# Altium PCB bdcmc.PcbDoc (part 2 of 2)
Units mm, origin at the board's own origin, x right, y up, seen from the top; angles counter-clockwise.
Board outline 100.53 x 64.8 mm, 4 copper layers (Top Layer, Layer 1, Layer 2, Bottom Layer), stack 1.601 mm thick; 206 components, 95 nets, 604 pads, 256 vias.
Unrouted connection lines stored in the file: 2.
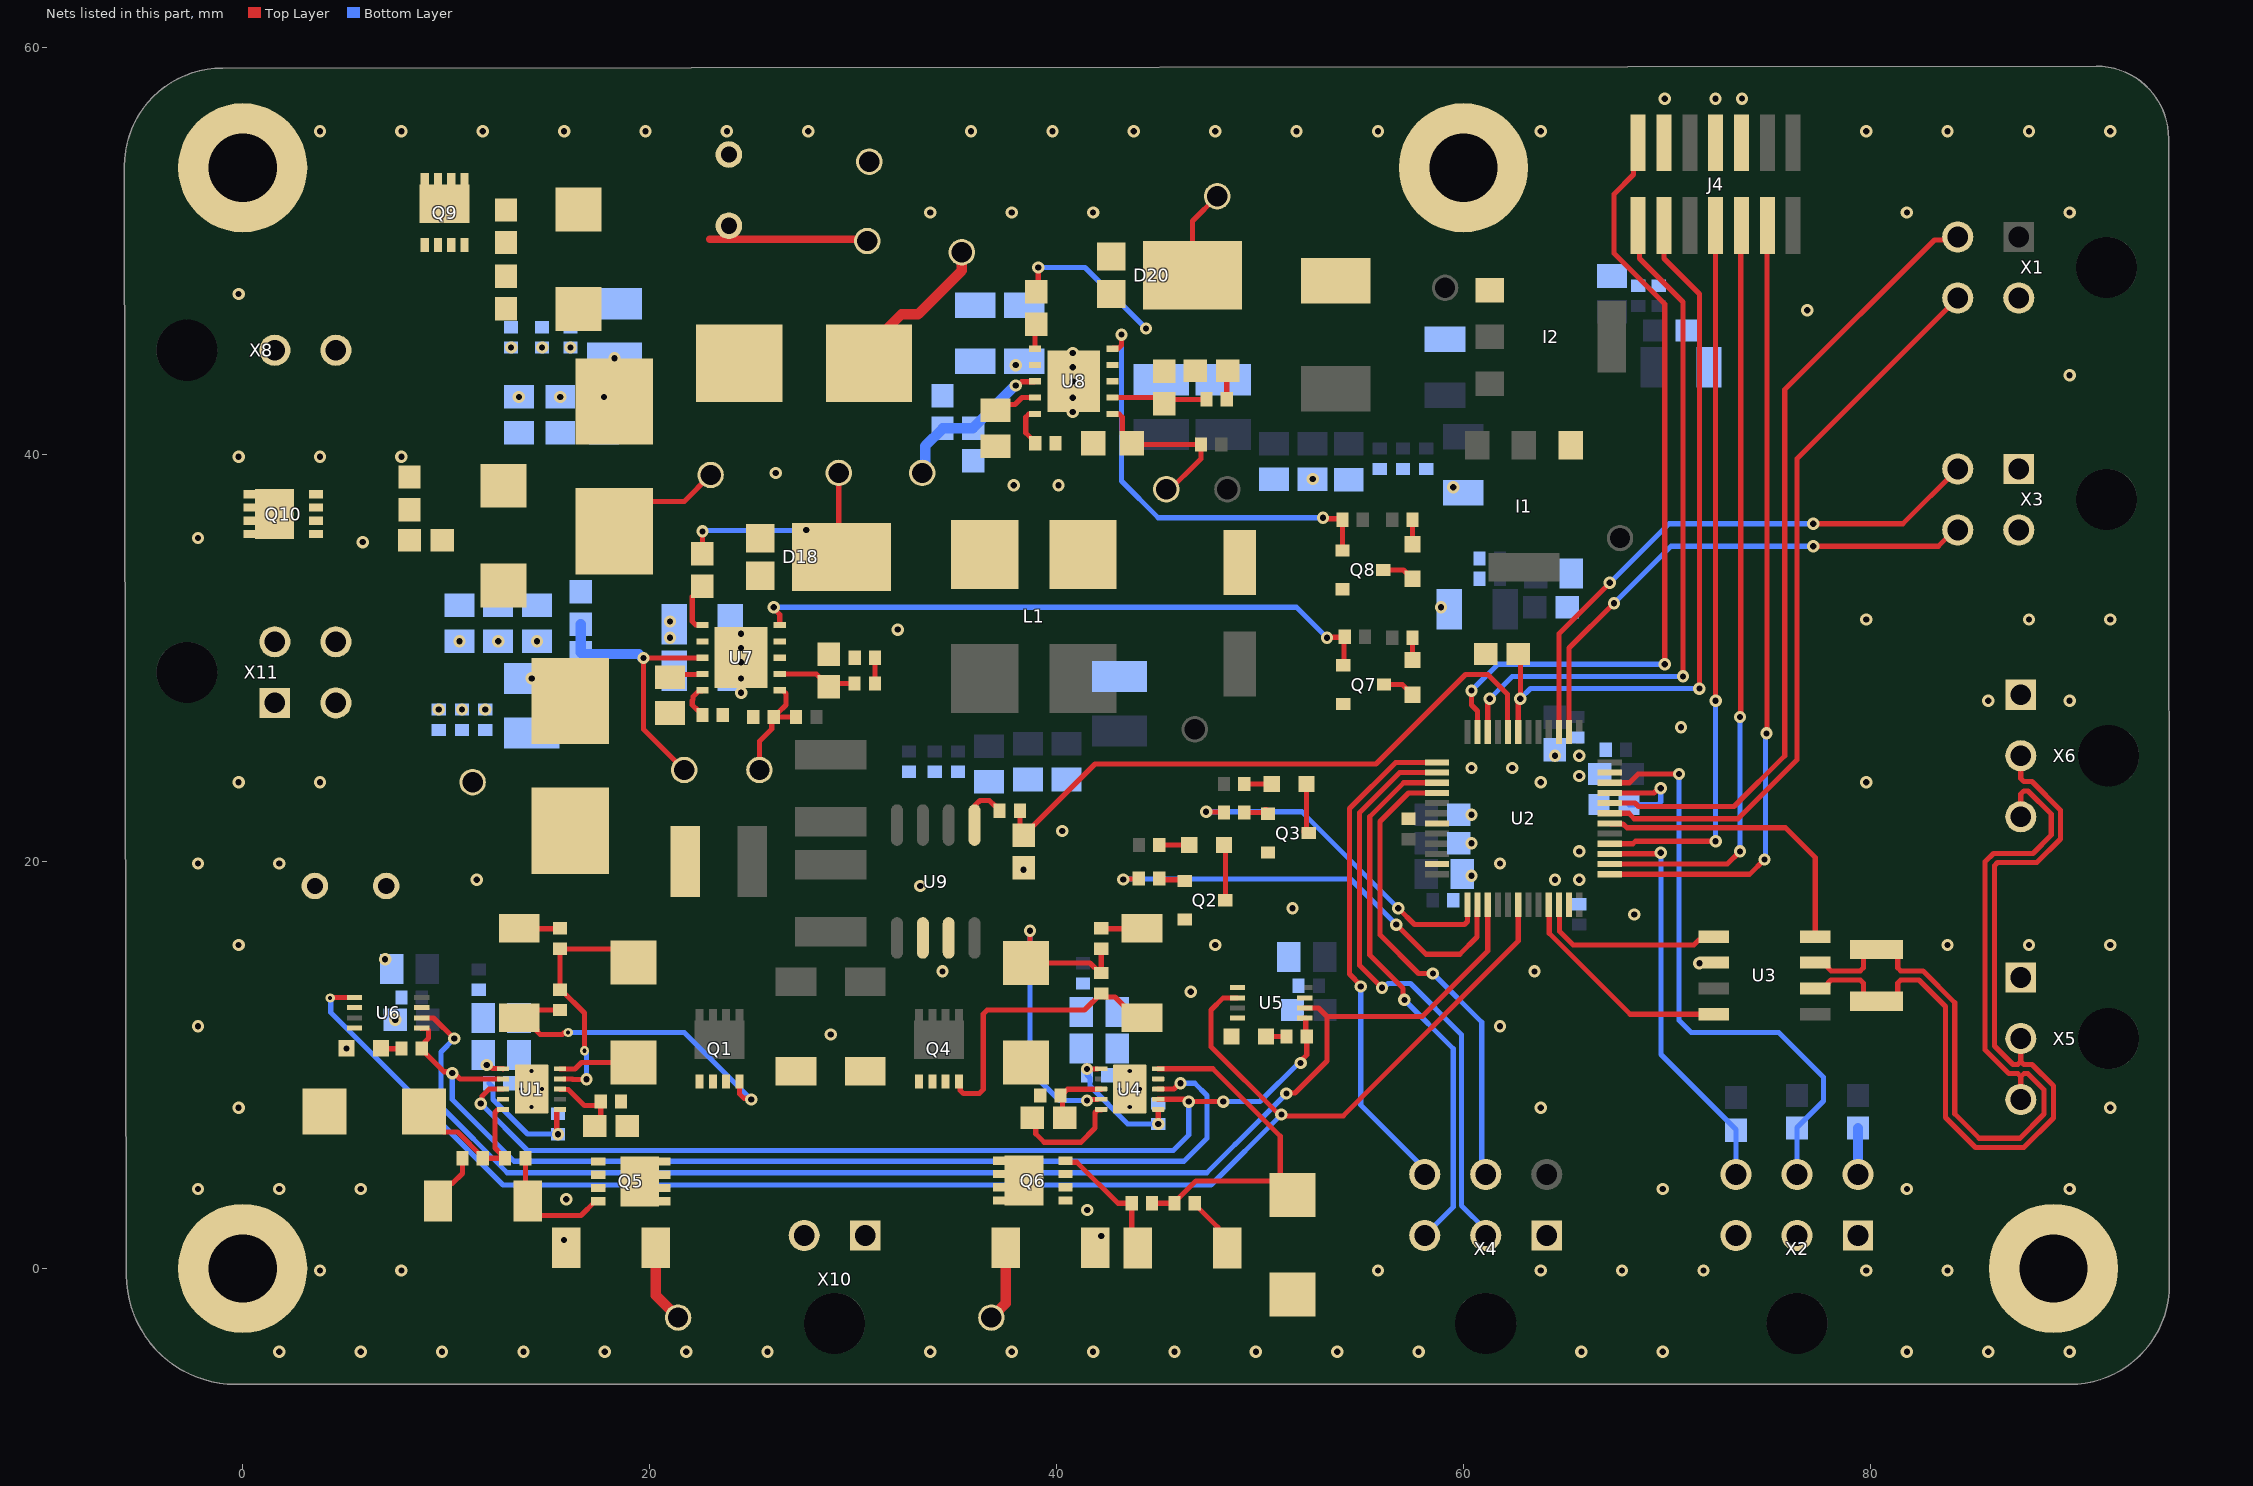
[diagram p4: the nets of this part, all layers, seen from the top]

## Via types
v1: diameter 0.605, hole 0.305, Top Layer to Bottom Layer, 241 vias
v2: diameter 0.605, hole 0.305, Top Layer to Bottom Layer, tented both sides, 12 vias
v3: diameter 0.45, hole 0.2, Top Layer to Bottom Layer, 3 vias

## Nets (pads, with @x,y where several pads share a name; then routed paths per layer and width w, separated by ;. In a path a pad name is that pad's centre, name@x,y a point inside that pad or via, vN(x,y) a via of type N, cw(c..) or ccw(c..) an arc to the next point about the centre after c; other vN are vias at no path point) (continued)
12V_HB_1: C1.1 C2.1 C15.1 C19.1 R1.1 U1.1 U1.6 | length 7.1
  Top Layer w0.254: v1(12,10) 12.095,10 12.272,9.823 12.793,9.823 U1.6@12.8,9.816 ; v1(15.5,6.6) 15.434,6.666 15.434,7.816 U1.1@15.6,7.816
  Bottom Layer w0.254: C15.1@12.1,9.1 12.273,8.927 12.273,8.755 12.3,8.728 12.3,8.3 14,6.6 v1(15.5,6.6)
12V_HB_2: C16.1 C17.1 C18.1 C23.1 R10.1 U4.1 U4.6 | length 6.3
  Top Layer w0.254: v1(41.5,9.8) U4.1@42.02,9.8 ; v1(45,7.1) U4.6@45,7.816
  Bottom Layer w0.254: C23.1@41.5,9.5 41.64,9.36 41.64,8.96 43.5,7.1 v1(45,7.1) ; v1(41.5,9.8) 41.567,9.733 C23.1@41.567,9.5
24V: 24V_FUSE.2 R41.1
24VPDB: 24V.1 24V_FUSE.1 C79.1 C80.1 C81.1 C82.1 C83.1 C84.1 C85.1 C86.1 D22.1 R43.1 X11.P$3 X11.P$4
  other v1: 9.638,27.47 10.781,27.47 11.924,27.47 14.21,29.002 10.654,30.832 12.559,30.832 14.464,30.832
BOOT: R2.2 U2.45 | length 4.9
  Top Layer w0.254: U2.45@67.199,23.372 69.377,23.372 69.605,23.6 v1(69.7,23.6)
  Bottom Layer w0.254: R2.2@68.141,22.794 69.551,22.794 69.7,22.942 v1(69.7,23.6)
BOOT_7: C56.1 U8.1 | length 1.2
  Top Layer w0.254: U8.1@38.95,45.207 38.95,46.35 C56.1@39,46.4
BOOT_12V: C30.1 U7.1 | length 2.5
  Top Layer w0.254: C30.1@22.592,33.536 22.592,33.511 22.1,33.019 22.1,31.8 22.259,31.641 22.574,31.641 U7.1@22.597,31.618
BOOTSTRAP_1: C3.1 C20.1 U1.3 | length 3.8
  Top Layer w0.254: U1.3@15.6,8.8 16,8.8 16.8,8 17.427,8 17.6,8.173 C20.1@17.6,8.2 17.6,7.3 C3.1@17.3,7
BOOTSTRAP_2: C21.1 C22.1 U4.3 | length 3.2
  Top Layer w0.254: C22.1@40.3,8.5 40.3,7.5 C21.1@40.4,7.4 ; C22.1@40.3,8.55 40.557,8.807 42.193,8.807 U4.3@42.2,8.8
CAN_H: R5.1 U3.7 X5.P$3 X6.P$3 | length 43.5
  Top Layer w0.254: U3.7@77.3,15.035 77.75,15.035 77.923,14.862 77.923,14.776 78.072,14.627 79.511,14.627 79.66,14.776 79.66,15.327 80.008,15.675 R5.1@80.3,15.675 81,15.675 81.348,15.327 81.348,14.776 81.497,14.627 81.856,14.627 82.588,14.627 84.154,13.061 84.154,7.6 85.354,6.4 87.358,6.4 88.546,7.588 88.546,8.786 87.759,9.573 87.549,9.573 87.4,9.424 ; X5.P$3@87.4,8.3 87.4,9.424 ; X6.P$3@87.4,22.2 87.4,23.324 87.549,23.473 87.759,23.473 88.9,22.332 88.9,21.3 88,20.4 86.061,20.4 85.646,19.985 85.646,10.749 86.822,9.573 87.251,9.573 87.4,9.424
CAN_L: R5.2 U3.6 X5.P$2 X6.P$2 | length 45
  Top Layer w0.254: U3.6@77.3,13.765 77.75,13.765 77.923,13.938 77.923,14.024 78.072,14.173 79.511,14.173 79.66,14.024 79.66,13.473 80.008,13.125 R5.2@80.3,13.125 81,13.125 81.348,13.473 81.348,14.024 81.497,14.173 82.044,14.173 82.4,14.173 83.7,12.873 83.7,7.412 85.166,5.946 87.546,5.946 89,7.4 89,8.974 87.947,10.027 87.549,10.027 87.4,10.176 ; X5.P$2@87.4,11.3 87.4,10.176 ; X6.P$2@87.4,25.2 87.4,24.076 87.549,23.927 87.947,23.927 89.354,22.52 89.354,21.112 88.188,19.946 86.249,19.946 86.1,19.797 86.1,10.937 87.01,10.027 87.251,10.027 87.4,10.176
CAN_RX_LED: R9.2 U2.25 | length 16.9
  Top Layer w0.254: v1(47.356,22.445) 47.371,22.431 48.218,22.431 R9.2@48.233,22.416 ; v1(56.8,17.7) 57.6,16.9 60.05,16.9 60.199,17.049 U2.25@60.199,17.872
  Bottom Layer w0.254: v1(47.356,22.445) 52.055,22.445 v1(56.8,17.7)
CAN_STB: U2.42 U3.8 | length 14.7
  Top Layer w0.254: U2.42@67.203,21.876 67.232,21.847 67.853,21.847 68.039,21.661 75.839,21.661 77.3,20.2 U3.8@77.3,16.305
CAN_TX_LED: R7.2 U2.26 | length 21.7
  Top Layer w0.254: v1(43.284,19.117) 43.307,19.141 44.025,19.141 R7.2@44.048,19.164 ; v1(56.7,16.9) 58.157,15.443 59.824,15.443 60.674,16.293 60.674,17.561 60.699,17.587 U2.26@60.699,17.872
  Bottom Layer w0.254: v1(43.284,19.117) 43.312,19.145 54.455,19.145 v1(56.7,16.9)
COMP_7V: C68.1 R35.2 U8.7 | length 4.8
  Top Layer w0.254: U8.7@42.75,42.807 44.993,42.807 C68.1@45.3,42.5 45.518,42.718 R35.2@47.37,42.718
COMP_12V: C42.1 R27.1 U7.7 | length 4
  Top Layer w0.254: U7.7@26.397,29.218 28.189,29.218 28.799,28.608 C42.1@28.799,28.583 28.964,28.748 R27.1@30.077,28.748
CSNS: C78.2 R42.2 U2.8 | length 30.6
  Top Layer w0.254: R42.2@38.2,22.5 38.2,21.5 C78.2@38.4,21.3 38.4,21.325 38.823,21.748 38.848,21.748 41.9,24.8 55.7,24.8 60.1,29.2 61.196,29.2 62.174,28.222 62.174,26.397 U2.8@62.199,26.372
EN_7V: EN_7V.1 R31.2 R33.1 U8.3 | length 8.1
  Top Layer w0.254: v1(38,43.4) 38.095,43.4 38.279,43.584 38.927,43.584 U8.3@38.95,43.607
  Bottom Layer w0.508: EN_7V.1@33.4,39.1 33.552,39.252 33.552,40.427 34.4,41.275 R31.2@34.4,41.3 R33.1@35.9,41.3 35.9,41.325 37.975,43.4 v1(38,43.4)
EN_12V: EN_12V.1 R23.2 R26.1 U7.3 | length 13.8
  Top Layer w0.254: EN_12V.1@21.7,24.5 19.7,26.5 v1(19.7,30) 19.709,30.009 22.588,30.009 U7.3@22.597,30.018
  Bottom Layer w0.508: R23.2@16.623,31.669 R26.1@16.623,30.272 16.695,30.2 19.474,30.2 19.674,30 v1(19.7,30)
FB_7V: FB_7V.1 R32.2 R36.1 U8.6 | length 8.5
  Top Layer w0.254: U8.6@42.75,42.007 42.773,41.984 43.083,41.984 43.232,41.835 43.232,41.032 R36.1@43.705,40.559 43.764,40.5 R32.2@47.1,40.5 47.1,39.8 FB_7V.1@45.4,38.1
FB_12V: FB_12V.1 R24.2 R28.1 U7.6 | length 5.7
  Top Layer w0.254: FB_12V.1@25.4,24.5 25.4,25.91 25.788,26.298 26.008,26.518 26.008,27.008 R28.1@26.1,27.1 R24.2@27.2,27.1 ; R28.1@26.1,27.15 26.273,27.323 26.323,27.323 26.7,27.7 26.7,28.265 26.547,28.418 U7.6@26.397,28.418
FDCAN_RX: U2.33 U3.4 | length 11.1
  Top Layer w0.254: U2.33@64.199,17.872 64.224,17.847 64.224,16.476 68.205,12.495 U3.4@72.3,12.495
FDCAN_TX: U2.34 U3.1 | length 9.3
  Top Layer w0.254: U2.34@64.699,17.872 64.724,17.847 64.724,16.576 65.4,15.9 71.328,15.9 71.56,16.132 72.127,16.132 U3.1@72.3,16.305
GND: C1.2 C2.2 C4.2 C5.2 C6.2 C7.2 C8.2 C9.2 C10.2 C11.2 C12.2 C13.2 C14.2 C15.2 C16.2 C17.2 C18.2 C19.2 C23.2 C24.2 C25.2 C26.2 C27.2 C28.2 C29.2 C31.2 C32.2 C33.2 C34.1 C35.2 C36.2 C37.2 C38.2 C39.2 C40.2 C41.2 C42.2 C43.2 C44.2 C45.2 C46.2 C47.2 C48.2 C49.2 C50.2 C51.2 C52.2 C53.2 C54.2 C55.2 C57.2 C58.2 C59.2 C60.2 C61.2 C62.2 C63.2 C64.2 C65.2 C66.2 C67.2 C68.2 C69.2 C70.2 C71.2 C72.2 C73.2 C74.2 C75.2 C76.2 C77.2 C78.1 C79.2 C80.2 C81.2 C82.2 C83.2 C84.2 C85.2 C86.2 D11.1 D12.1 D13.2 D14.2 D18.1 D20.1 D21.2 D22.2 GND.1 I1.1 I2.1 J4.05 J4.07 J4.11 MDIR_1.2 MDIR_2.2 pad. Q2.2 Q3.2 Q5.2 Q6.2 Q7.2 Q8.2 Q9.3 Q10.3 R2.1 R25.2 R26.2 R28.2 R33.2 R34.2 R36.2 R38.2 R44.2 U1.9 U1.11 U2.19 U2.23 U2.35 U2.47 U3.2 U4.9 U4.11 U5.1 U5.4 U5.7 U6.2 U6.4 U6.7 U7.8 U7.11 U8.8 U8.11 U9.2 U9.3 X1.P$2 X2.P$1 X2.P$2 X2.P$3 X3.P$1 X3.P$2 X4.P$1 X5.P$1 X6.P$1
  other v1: 1.8,-4.1 5.8,-4.1 21.8,-4.1 25.8,-4.1 33.8,-4.1 37.8,-4.1 41.8,-4.1 45.8,-4.1 49.8,-4.1 53.8,-4.1 57.8,-4.1 65.8,-4.1 69.8,-4.1 81.8,-4.1 85.8,-4.1 89.8,-4.1 3.8,-0.1 7.8,-0.1 55.8,-0.1 63.8,-0.1 67.8,-0.1 71.8,-0.1 79.8,-0.1 83.8,-0.1 15.8,1.4 42.2,1.6 41.515,2.87 15.9,3.4 -2.2,3.9 1.8,3.9 5.8,3.9 69.8,3.9 81.8,3.9 89.8,3.9 -0.2,7.9 91.8,7.9 5.098,10.816 28.9,11.5 -2.2,11.9 61.8,11.9 7.5,12.216 46.6,13.6 34.4,14.6 63.5,14.6 71.6,15 7,15.2 -0.2,15.9 47.8,15.9 87.8,15.9 91.8,15.9 68.4,17.4 51.6,17.7 33.3,18.8 11.5,19.1 64.5,19.1 65.7,19.1 60.4,19.3 38.38,19.596 -2.2,19.9 1.8,19.9 61.8,19.9 65.7,20.5 60.4,20.9 40.28,21.496 60.4,22.3 -0.2,23.9 3.8,23.9 63.8,23.9 65.7,24.2 60.4,24.6 62.4,24.6 64.5,25.2 65.7,25.2 70.7,26.6 89.8,27.9 24.5,28.3 24.5,29 24.5,29.8 24.5,30.5 24.5,31.2 32.2,31.4 87.8,31.9 91.8,31.9 58.9,32.5 5.9,35.7 -2.2,35.9 59.5,38.4 37.9,38.5 40.1,38.5 52.6,38.8 26.2,39.1 -0.2,39.9 3.8,39.9 7.8,39.9 40.8,42.1 40.8,42.8 40.8,43.6 89.8,43.9 40.8,44.3 40.8,45 76.9,47.1 -0.2,47.9 33.8,51.9 37.8,51.9 41.8,51.9 89.8,51.9 3.8,55.9 7.8,55.9 11.8,55.9 15.8,55.9 19.8,55.9 23.8,55.9 27.8,55.9 35.8,55.9 39.8,55.9 43.8,55.9 47.8,55.9 51.8,55.9 55.8,55.9 63.8,55.9 79.8,55.9 83.8,55.9 87.8,55.9 91.8,55.9 69.894,57.496 72.394,57.496 73.7,57.5
  other v2: 9.8,-4.1 13.8,-4.1 17.8,-4.1 63.8,7.9 83.8,15.9 79.8,23.9 85.8,27.9 79.8,31.9 81.8,51.9
HS_GATE_1: D7.1 R11.1 R13.1 U1.4 | length 12
  Top Layer w0.254: U1.4@15.773,9.309 16.201,9.309 16.216,9.293 16.893,9.293 v1(16.9,9.3) ; v3(16.8,10.7) 16.8,12.55 15.65,13.7 R13.1@15.6,13.7 15.6,15.7 18.532,15.7 D7.1@19.2,15.032
  Bottom Layer w0.254: v3(16.8,10.7) 16.9,10.6 v1(16.9,9.3)
HS_GATE_2: D8.1 R12.1 R14.1 U4.4 | length 17.6
  Top Layer w0.254: v1(38.7,16.6) 38.7,15.216 D8.1@38.5,15.016 41.65,15.016 42.15,14.516 R14.1@42.2,14.516 R12.1@42.2,15.716 ; v1(41.5,8.25) 41.55,8.3 U4.4@42.02,8.3
  Bottom Layer w0.254: v1@38.7,16.555 38.7,9.7 40.15,8.25 v1(41.5,8.25)
I2C_SCL: R3.1 U2.39 X2.P$6 | length 19.9
  Top Layer w0.254: U2.39@67.199,20.372 67.213,20.386 69.658,20.386 v1(69.7,20.428)
  Bottom Layer w0.254: v1(69.7,20.428) 69.717,20.411 69.717,10.508 73.4,6.825 R3.1@73.4,6.8 X2.P$6@73.4,4.62
I2C_SDA: R4.1 U2.46 X2.P$5 | length 29.1
  Top Layer w0.254: U2.46@67.199,23.872 68.172,23.872 68.6,24.3 v1(70.6,24.3)
  Bottom Layer w0.254: v1@70.6,24.158 70.6,12.2 71.2,11.6 75.5,11.6 77.7,9.4 77.7,8.225 76.4,6.925 R4.1@76.4,6.9 X2.P$5@76.4,4.62
LIMIT_A: U2.2 X3.P$4 | length 25.6
  Top Layer w0.254: U2.2@65.199,26.372 65.199,30.499 v1(67.4,32.7) ; v2(77.2,35.5) 83.345,35.5 84.144,36.3 X3.P$4@84.3,36.3
  Bottom Layer w0.254: v1(67.4,32.7) 70.2,35.5 v2(77.2,35.5)
LIMIT_B: U2.3 X3.P$3 | length 27.8
  Top Layer w0.254: U2.3@64.699,26.372 64.699,31.199 v1(67.2,33.7) ; v2(77.2,36.6) 81.6,36.6 X3.P$3@84.3,39.3
  Bottom Layer w0.254: v1(67.2,33.7) 70.1,36.6 v2(77.2,36.6)
LS_Gate_1: D13.1 R15.1 R17.1 U1.10 | length 7.9
  Top Layer w0.254: D13.1@8.916,7.716 8.916,7.666 9.869,6.713 10.553,6.713 11.8,5.466 R15.1@11.8,5.416 12.8,5.416 R17.1@12.9,5.416 12.9,5.466 12.727,5.639 12.677,5.639 12.4,5.916 12.4,7.667 12.549,7.816 U1.10@12.8,7.816
LS_GATE_2: D14.1 R16.1 R18.1 U4.10 | length 17.3
  Top Layer w0.254: R18.1@44.7,3.2 R16.1@45.8,3.2 ; U4.10@45,9.816 47.684,9.816 51,6.5 51,4.384 D14.1@50.891,4.275 ; R16.1@45.8,3.25 46.85,4.3 50.916,4.3 D14.1@51.6,3.616
M+: C3.2 C20.2 D5.1 D7.2 D11.2 M+.1 Q1.2 Q5.3 U1.5 X10.P$2 | length 7.6
  Top Layer w0.254: U1.5@15.6,9.8 16.341,9.8 16.657,10.116 D7.2@19.2,10.116
  Top Layer w0.508: D11.2@20.3,1.016 20.3,-1.316 M+.1@21.4,-2.416
M-: C21.2 C22.2 D6.1 D8.2 D12.2 M-.1 Q4.2 Q6.3 U4.5 X10.P$1 | length 9.1
  Top Layer w0.254: C21.2@38.8,7.4 38.982,7.218 38.982,6.618 39.4,6.2 41.2,6.2 41.9,6.9 41.9,7.666 42.034,7.8 U4.5@42.2,7.8
  Top Layer w0.508: M-.1@36.8,-2.416 37.5,-1.716 D12.2@37.5,1.016
MOTOR_DIR: U2.27 U5.6 U6.6 | length 67.8
  Top Layer w0.254: U6.6@8.8,12.316 8.802,12.314 9.386,12.314 v1(10.4,11.3) ; v1(51.3,8.6) 51.329,8.629 51.729,8.629 53.3,10.2 53.3,12.382 ; U5.6@52.2,12.8 52.882,12.8 53.3,12.382 ; U2.27@61.199,17.872 61.199,15.599 57.982,12.382 53.3,12.382
  Bottom Layer w0.254: v1(10.4,11.3) 9.743,10.643 9.743,7.957 13,4.7 47.387,4.7 48.787,6.1 48.8,6.1 v1(51.3,8.6)
MOTOR_DIR_IN_1: R20.1 U1.7 U4.8 U6.5 | length 50.9
  Top Layer w0.254: U6.5@8.8,11.8 9.046,11.8 9.141,11.705 9.141,11.321 8.973,11.153 8.973,10.973 8.8,10.8 8.8,10.766 9.899,9.667 10.233,9.667 v1(10.3,9.6) 10.395,9.6 10.679,9.316 U1.7@12.627,9.316 ; U4.8@45,8.816 45.007,8.823 45.776,8.823 46.053,9.1 v1(46.1,9.1)
  Bottom Layer w0.254: v1(10.3,9.6) 10.3,8.306 13.336,5.27 46.27,5.27 47.4,6.4 47.4,8.5 46.8,9.1 v1(46.1,9.1)
MOTOR_DIR_IN_2: R19.1 U1.8 U4.7 U5.5 | length 49.5
  Top Layer w0.254: v1(11.7,8.1) 11.767,8.167 11.767,8.464 12.119,8.816 U1.8@12.8,8.816 ; U4.7@45,8.316 46.289,8.316 46.405,8.2 v1(48.2,8.2) ; v1(52,10.1) 52,10.195 52.3,10.495 R19.1@52.3,11.4 52.25,11.45 52.25,12.298 52.248,12.3 U5.5@52.2,12.3
  Bottom Layer w0.254: v1(11.7,8.1) 14,5.8 45.744,5.8 46.5,6.556 v1(46.5,8.2) ; v1(48.2,8.2) 50.005,8.2 51.905,10.1 v1(52,10.1)
MOTOR_PWM: U2.30 U5.2 U6.1 | length 78.7
  Top Layer w0.254: v3(4.3,13.3) 4.314,13.314 5.498,13.314 U6.1@5.5,13.316 ; U5.2@48.9,13.3 48.2,13.3 47.6,12.7 47.6,10.9 51,7.5 54.1,7.5 62.699,16.099 U2.30@62.699,17.872
  Bottom Layer w0.254: v3(4.3,13.3) 4.325,13.275 4.325,12.575 12.8,4.1 47.6,4.1 v1@51,7.5
  other v1: 51.053,7.564
Net7V_PGOOD_1: 7V_PGOOD.1 R29.2 | length 1.2
  Top Layer w0.254: 7V_PGOOD.1@57.5,35.602 R29.2@57.5,36.8
Net7V_PGOOD_2: 7V_PGOOD.2 Q8.3 | length 1.6
  Top Layer w0.254: Q8.3@56.058,34.336 57.064,34.336 7V_PGOOD.2@57.5,33.9
Net12V_PGOOD_1: 12V_PGOOD.1 R21.2 | length 1.1
  Top Layer w0.254: 12V_PGOOD.1@57.5,29.902 R21.2@57.5,31
Net12V_PGOOD_2: 12V_PGOOD.2 Q7.3 | length 1.6
  Top Layer w0.254: Q7.3@56.1,28.7 57,28.7 12V_PGOOD.2@57.5,28.2
NetC43_1: C43.1 R27.2 | length 1.3
  Top Layer w0.254: R27.2@31.077,28.748 31.081,28.752 31.081,30.014 C43.1@31.085,30.018
NetC69_1: C69.1 R35.1 | length 1.4
  Top Layer w0.254: R35.1@48.37,42.718 48.37,44.069 C69.1@48.416,44.115
NetCAN_RX_1: CAN_RX.1 R8.1 | length 1.4
  Top Layer w0.254: R8.1@49.233,23.813 CAN_RX.1@50.587,23.813
NetCAN_RX_2: CAN_RX.2 Q3.3 | length 2.5
  Top Layer w0.254: Q3.3@52.289,21.461 CAN_RX.2@52.289,23.813
  Top Layer w0.508: Q3.3@52.289,21.461 52.35,21.4 Q3.3@52.4,21.4
NetCAN_TX_1: CAN_TX.1 R6.1 | length 1.5
  Top Layer w0.254: R6.1@45.056,20.815 CAN_TX.1@46.529,20.815
NetCAN_TX_2: CAN_TX.2 Q2.3 | length 2.7
  Top Layer w0.254: CAN_TX.2@48.231,20.815 48.3,20.746 Q2.3@48.3,18.1
NetD3_1: D3.1 Q1.1 R13.2 | length 16.7
  Top Layer w0.254: D3.1@13.6,12.3 14,12.7 R13.2@15.6,12.7 ; D3.1@13.6,12.316 13.9,12.316 14.473,11.743 14.473,11.654 14.622,11.505 15.705,11.505 15.762,11.562 15.962,11.562 v3(16,11.6) ; Q1.1@24.412,9.177 24.412,8.588 24.633,8.367 24.933,8.367 v2(25,8.3)
  Bottom Layer w0.254: v3(16,11.6) 21.7,11.6 v2(25,8.3)
NetD3_2: D3.2 R11.2 | length 2
  Top Layer w0.254: D3.2@13.6,16.7 R11.2@15.6,16.7
NetD4_1: D4.1 Q4.1 R14.2 | length 14.2
  Top Layer w0.254: Q4.1@35.2,9.193 35.273,9.12 35.273,8.749 35.422,8.6 36.2,8.6 36.4,8.8 36.4,12.5 36.6,12.7 41.384,12.7 R14.2@42.2,13.516 42.373,13.343 42.873,13.343 43.9,12.316 D4.1@44.2,12.316
NetD4_2: D4.2 R12.2 | length 2
  Top Layer w0.254: R12.2@42.2,16.7 D4.2@44.2,16.7
NetD9_1: D9.1 Q5.1 R17.2 | length 6.3
  Top Layer w0.254: R17.2@13.9,5.4 13.9,3.4 D9.1@14,3.3 ; D9.1@14,3.316 14,3.173 14.573,2.6 16.623,2.6 17.327,3.304 Q5.1@17.477,3.304
NetD9_2: D9.2 R15.2 | length 2.7
  Top Layer w0.254: D9.2@9.6,3.3 9.6,3.6 10.173,4.173 10.304,4.173 10.8,4.669 R15.2@10.8,5.4
NetD10_1: D10.1 Q6.1 R18.2 | length 6.4
  Top Layer w0.254: Q6.1@40.44,5.291 40.513,5.218 41.001,5.218 43.019,3.2 R18.2@43.7,3.2 43.7,1.516 D10.1@44.1,1.116
NetD10_2: D10.2 R16.2 | length 2.8
  Top Layer w0.254: R16.2@46.8,3.2 46.8,3.15 47.927,2.023 47.927,1.689 D10.2@48.5,1.116
NetF1_2: F1.2 X2.P$4 | length 2.3
  Bottom Layer w0.508: X2.P$4@79.4,4.62 F1.2@79.4,6.9
NetMDIR_1_1: MDIR_1.1 R20.2 | length 1
  Top Layer w0.254: MDIR_1.1@6.8,10.8 R20.2@7.8,10.8
NetMDIR_2_1: MDIR_2.1 R19.2 | length 1
  Top Layer w0.254: MDIR_2.1@50.3,11.4 R19.2@51.3,11.4
NetQ2_1: Q2.1 R7.1 | length 1.3
  Top Layer w0.254: R7.1@45.048,19.164 45.105,19.107 46.243,19.107 Q2.1@46.3,19.05
NetQ3_1: Q3.1 R9.1 | length 1.2
  Top Layer w0.254: R9.1@49.233,22.416 Q3.1@50.284,22.416
  Top Layer w0.508: Q3.1@50.284,22.416 50.35,22.35 Q3.1@50.4,22.35
NetQ9_1: Q9.1 R37.2 R38.1
NetQ9_2: Q9.2 X8.P$1
NetQ10_1: Q10.1 R43.2 R44.1
NetQ10_2: Q10.2 X11.P$1 X11.P$2
NetR42_1: R42.1 U9.5 | length 2.5
  Top Layer w0.254: U9.5@35.972,21.79 36.036,21.854 36.036,22.801 36.235,23 36.7,23 36.977,22.723 37.027,22.723 37.2,22.55 R42.1@37.2,22.5
NRST: C14.1 J4.12 U2.7 | length 36.4
  Top Layer w0.254: U2.7@62.699,26.372 62.699,27.804 62.8,27.905 v1(62.8,28) 62.8,30.1 C14.1@62.7,30.2 ; J4.12@69.86,51.265 69.862,51.263 69.862,49.638 71.6,47.9 v1(71.6,28.5)
  Bottom Layer w0.254: v1(62.8,28) 63.3,28.5 v1(71.6,28.5)
PWGRD_7: Q8.1 R30.2 U8.10 | length 21.4
  Top Layer w0.254: U8.10@42.75,45.207 42.773,45.23 43.051,45.23 43.2,45.379 v1(43.2,45.9) ; v1(53.1,36.9) 53.148,36.852 54.01,36.852 R30.2@54.058,36.803 Q8.1@54.058,35.286
  Bottom Layer w0.254: v1(43.2,45.9) 43.2,38.7 45,36.9 v1(53.1,36.9)
PWGRD_12V: Q7.1 R22.2 U7.10 | length 31.1
  Top Layer w0.254: v1(26.1,32.5) 26.1,32.446 26.397,32.149 U7.10@26.397,31.618 ; v1(53.3,31) 53.325,31.025 54.144,31.025 R22.2@54.169,31.05 54.134,31.016 54.134,29.684 Q7.1@54.1,29.65
  Bottom Layer w0.254: v1(26.1,32.5) 51.8,32.5 v1(53.3,31)
QUAD_A: U2.43 X1.P$4 | length 36.5
  Top Layer w0.254: U2.43@67.199,22.372 68.128,22.372 68.4,22.1 73.5,22.1 76.4,25 76.4,39.8 X1.P$4@84.3,47.7
QUAD_B: U2.44 X1.P$3 | length 39.3
  Top Layer w0.254: U2.44@67.199,22.872 68.436,22.872 68.608,22.7 73.3,22.7 75.8,25.2 75.8,43.2 83.154,50.554 84.154,50.554 X1.P$3@84.3,50.7
RT/CLK_7V: R34.1 U8.5 | length 2
  Top Layer w0.254: U8.5@38.95,42.007 38.927,41.984 38.637,41.984 38.488,41.835 38.488,41.074 38.953,40.609 R34.1@38.953,40.559
RT/CLK_12V: R25.1 U7.5 | length 1.7
  Top Layer w0.254: U7.5@22.597,28.418 22.574,28.395 22.424,28.395 22.142,28.113 22.142,27.963 22.1,27.921 22.1,27.7 22.377,27.423 22.427,27.423 22.6,27.25 R25.1@22.6,27.2
SPI_CS: U2.16 X4.P$5 | length 23.3
  Top Layer w0.254: v1(58.5,14.5) 57.8,14.5 55.9,16.4 55.9,21.973 57.299,23.372 U2.16@58.699,23.372
  Bottom Layer w0.254: v1(58.5,14.5) 60.9,12.1 60.9,4.82 X4.P$5@61.1,4.62
SPI_MISO: U2.14 X4.P$2 | length 29.1
  Top Layer w0.254: v1(56,13.8) 54.9,14.9 54.9,22.4 56.872,24.372 U2.14@58.699,24.372
  Bottom Layer w0.254: v1(56,13.8) 56.095,13.8 56.295,14 57.4,14 59.9,11.5 59.9,3.1 61.1,1.9 X4.P$2@61.1,1.62
SPI_MOSI: U2.15 X4.P$3 | length 26.8
  Top Layer w0.254: v1(57.1,13.2) 57.033,13.267 57.033,13.767 55.4,15.4 55.4,22.2 57.072,23.872 U2.15@58.699,23.872
  Bottom Layer w0.254: v1(57.1,13.2) 59.5,10.8 59.5,3.02 X4.P$3@58.1,1.62
SPI_SCK: U2.13 X4.P$6 | length 24.8
  Top Layer w0.254: v1(54.956,13.856) 54.956,13.914 54.4,14.47 54.4,22.6 56.672,24.872 U2.13@58.699,24.872
  Bottom Layer w0.254: v1(54.956,13.856) 54.956,8.035 58.1,4.891 X4.P$6@58.1,4.62
SS/TR_7V: C59.1 U8.4 | length 2.2
  Top Layer w0.254: C59.1@37,42.18 37.287,42.467 37.967,42.467 38.307,42.807 U8.4@38.95,42.807
SS/TR_12V: C33.1 U7.4 | length 1.7
  Top Layer w0.254: C33.1@21,29.06 21.135,29.195 22.574,29.195 U7.4@22.597,29.218
STLINK_RX: J4.13 U2.11 | length 39.4
  Top Layer w0.254: v1(60.4,28.4) 60.4,27.698 60.699,27.399 U2.11@60.699,26.372 ; J4.13@68.59,55.335 68.365,55.11 68.365,53.765 67.4,52.8 67.4,49.9 69.9,47.4 v1(69.9,29.7)
  Bottom Layer w0.254: v1(60.4,28.4) 61.7,29.7 v1(69.9,29.7)
STLINK_TX: J4.14 U2.10 | length 34.7
  Top Layer w0.254: U2.10@61.199,26.372 61.199,27.804 61.3,27.905 v1(61.3,28) ; J4.14@68.59,51.265 68.662,51.193 68.662,49.638 70.8,47.5 v1(70.8,29.1)
  Bottom Layer w0.254: v1(61.3,28) 62.4,29.1 v1(70.8,29.1)
SW_7V: C56.2 D20.2 L2.2 SW_7V.1 U8.9 | length 12.2
  Top Layer w0.254: C56.2@39,48 39.1,48.1 v1(39.1,49.2) ; D20.2@46.682,48.82 46.682,51.482 SW_7V.1@47.9,52.7
  Bottom Layer w0.254: v1(39.1,49.2) 41.4,49.2 v1(44.4,46.2)
SW_12V: C30.2 D18.2 L1.1 SW_12V.1 U7.9 | length 10.4
  Top Layer w0.254: C30.2@22.592,35.136 22.6,35.144 v1(22.6,36.227) ; SW_12V.1@29.3,39.1 29.3,35.104 D18.2@29.433,34.971
  Bottom Layer w0.254: v1(22.6,36.227) 22.637,36.263 27.664,36.263 v1(27.7,36.3)
SWCLK: J4.06 U2.38 | length 37.5
  Top Layer w0.254: U2.38@67.199,19.872 72.972,19.872 v1(73.6,20.5) ; v1(73.6,27.1) 73.635,27.135 73.635,51.23 J4.06@73.67,51.265
  Bottom Layer w0.254: v1(73.6,20.5) v1(73.6,27.1)
SWDIO: J4.04 U2.37 | length 39.1
  Top Layer w0.254: U2.37@67.199,19.372 74.072,19.372 v1(74.8,20.1) ; v1(74.9,26.3) 74.92,26.32 74.92,51.245 J4.04@74.94,51.265
  Bottom Layer w0.254: v1(74.8,20.1) 74.85,20.15 74.85,26.25 v1(74.9,26.3)
SWO: J4.08 U2.40 | length 35.5
  Top Layer w0.254: U2.40@67.199,20.872 68.328,20.872 68.456,21 v1(72.4,21) ; v1(72.4,27.9) J4.08@72.4,51.265
  Bottom Layer w0.254: v1(72.4,21) v1(72.4,27.9)
VBAT: 7V_FUSE.1 12V_FUSE.1 C70.1 C71.1 C72.1 C73.1 C74.1 C75.1 C76.1 C77.1 D21.1 R37.1 VBAT.1 X8.P$2 | length 7.8
  Top Layer w0.381: 22.973,50.592 30.608,50.592 VBAT.1@30.7,50.5
  other v1: 13.575,42.836 15.607,42.836 17.766,42.836 18.274,44.735 13.194,45.266 14.718,45.266 16.115,45.266
VBAT_Fused: 12V_FUSE.2 C31.1 C32.1 R23.1 U7.2 VBAT_FUSED.1 | length 6
  Top Layer w0.254: 12V_FUSE.2@18.274,36.241 18.274,36.457 19.517,37.7 21.7,37.7 VBAT_FUSED.1@23,39
  other v1: 21,31 21,31.8
VBAT_LDOS: 7V_FUSE.2 C57.1 C58.1 R31.1 U8.2 VBAT_LDOS.1 | length 7.3
  Top Layer w0.508: 7V_FUSE.2@30.745,45.258 32.383,46.895 33.195,46.895 35.348,49.048 VBAT_LDOS.1@35.348,49.948 VBAT_LDOS.1@35.5,50.1
  other v1: 38,44.4
pads on no net: J4.01 J4.02 J4.09 J4.10 U1.2 U2.4 U2.5 U2.6 U2.9 U2.12 U2.17 U2.18 U2.22 U2.28 U2.29 U2.31 U2.32 U2.41 U4.2 U5.3 U6.3 U9.4 X1.1 X2.1 X3.1 X4.1 X5.1 X6.1 X8.1 X10.1 X11.1

## Polygon pours and split planes (outlines as drawn)
GND on Top Layer "GND_L01_P078" (solid, pour order 78): -7.592,-3.307 ccw(c-3.4,-3.307) -3.4,-7.5 91.601,-7.505 ccw(c91.601,-2.597) 96.509,-2.597 96.494,55.574 ccw(c92.965,55.574) 92.965,59.103 -2.995,58.992 ccw(c-2.995,54.405) -7.582,54.405
NetQ10_1 on Top Layer "NONET_L-01_P-001" (solid, pour order 77): 3.257,37.8 3.2,37.857 3.2,37.87 3.2,38.3 3.3,38.4 6.9,38.4 7.3,38 8.7,38 8.8,37.9 8.8,35.2 8.7,35.1 7.6,35.1 7.5,35.2 7.5,36.7 6.4,37.8
NetQ9_1 on Top Layer "NONET_L-01_P-001" (solid, pour order 76): 10.646,49.954 10.646,50.946 10.8,51.1 13.6,51.1 13.7,51 13.7,48.3 13.531,48.131 12.368,48.131 12.3,48.2 12.3,49.1 12,49.4 11.2,49.4
M+ on Top Layer "M+_L01_P011" (solid, pour order 11): 19.3,0 24.8,0 25.4,0.6 27.897,0.6 28.006,0.596 28.51,1.1 28.51,2.09 28.5,2.1 28.5,10.3 28.2,10.6 26,10.6 25.9,10.5 25.9,7.9 25.4,7.4 24.3,7.4 24,7.7 24,9.6 23.9,9.7 20.7,9.7 20.6,9.8 20.6,11.2 20.4,11.4 18,11.4 17.9,11.3 17.9,10.4 17.708,10.208 17.708,9.992 17.9,9.8 17.9,8.9 18.2,8.6 18.2,3.2 19.3,2.1
3V3 on Top Layer "NONET_L-01_P-001" (solid, pour order 75): 53.6,14.1 51.8,14.1 51.7,14 51.7,13.7 51.8,13.6 53,13.6 53.1,13.5 53.5,13.5 53.7,13.7 53.7,14
3V3 on Top Layer "NONET_L-01_P-001" (solid, pour order 68): 9.8,13.1 9.9,13.2 9.9,13.5 9.8,13.7 8.5,13.7 8.4,13.6 8.4,13.2 8.5,13.1
5V on Top Layer "5V_L01_P067" (solid, pour order 67): 74.7,13.537 74.563,13.4 71.6,13.4 71.5,13.5 71.5,14.1 71.6,14.2 74.5,14.2 74.6,14.1 74.7,14
5V on Top Layer "5V_L01_P019" (solid, pour order 19): 65.5,45 60.5,45 60.3,45.2 60.2,45.3 60.2,46.4 60.4,46.6 65.4,46.6 66.6,47.8 68.7,47.8 68.9,47.6 68.9,44.3 68.5,43.9 66.6,43.9
3V3 on Top Layer "3V3_L01_P063" (solid, pour order 63): 78,13.1 79.2,11.9 79.2,11 77.9,9.7 65.7,9.7 65.5,9.9 65.5,11.1 65.8,11.4 74.7,11.4 76.4,13.1
3V3 on Top Layer "3V3_L01_P044" (solid, pour order 44): 65.5,18.5 65.5,16.6 65.7,16.4 66.1,16.4 66.4,16.7 66.4,18.3 66.1,18.6 65.6,18.6
3V3 on Top Layer "3V3_L01_P037" (solid, pour order 37): 65.5,29.4 67.4,31.3 68.8,31.3 68.9,31.2 68.9,25 68.6,24.7 66.5,24.7 66.4,24.8 66.4,25.4 66.1,25.7 65.6,25.7 65.5,25.8
12V on Top Layer "12V_L01_P008" (solid, pour order 8): 49.15,26.05 32.95,26.05 31.1,24.2 27.4,24.2 27.2,24.4 27.2,26 27.8,26.6 27.8,27.5 28,27.7 31.6,27.7 33.9,30 33.9,30.5 34.1,30.8 46,30.8 46.7,31.5 49.9,31.5 50.3,31.1 50.3,27.2
3V3 on Top Layer "3V3_L01_P035" (solid, pour order 35): 33.9,20.7 36.5,18.1 40.7,18.1 42.8,20.2 44.3,20.2 44.4,20.3 44.4,21.4 46.4,23.4 48.5,23.4 48.6,23.5 48.6,24.2 48.4,24.4 45.5,24.4 39.9,18.8 37.2,18.8 35.1,20.9 35.1,22.8 34.9,23 33.3,23 33.1,22.8 33.1,20.9 33.3,20.7
M- on Top Layer "M-_L01_P012" (solid, pour order 12): 29.3,1 30.5,-0.2 38.3,-0.2 38.4,-0.1 38.4,2.2 38.6,2.4 38.9,2.4 39.5,3 39.5,5.9 39.7,6.1 39.7,6.3 39.5,6.5 39.5,8 39.7,8.2 39.7,9.7 39.8,9.8 39.8,11.3 39.7,11.4 37.3,11.4 37.2,11.3 37.2,8 36.5,7.3 35,7.3 34.8,7.5 34.8,9.5 34.7,9.6 32.2,9.6 31.8,10 31.8,10.4 31.6,10.6 29.6,10.6 29.3,10.3
3V3 on Top Layer "3V3_L01_P018" (solid, pour order 18): 59.3,21.6 56.5,21.6 56.4,21.5 56.4,19.2 56.5,19.1 59.3,19.1 59.4,19.2 59.4,19.5 59.3,19.6 57.9,19.6 57.8,19.7 57.8,20.6 57.9,20.7 59.3,20.7 59.4,20.8 59.4,21.5
3V3 on Top Layer "3V3_L01_P023" (solid, pour order 23): 64.1,36.2 64.1,41.8 63.5,42.4 62.7,42.4 62.2,41.9 62.2,39.5 61.1,38.4 61.1,32.2 61.3,32 64,32 64.2,32.2 64.2,33 64.5,33.3 65.6,34.4 65.6,34.7
7V on Top Layer "7V_L01_P017" (solid, pour order 17): 47.7,39.987 48.187,39.5 48.6,39.5 49,39.9 59.6,39.9 60,39.5 61.3,39.5 61.6,39.8 61.6,42 62.2,42.6 62.2,44.2 62,44.4 60.2,44.4 57.6,41.8 55.7,41.8 55.4,42.1 55.4,44.1 52.1,44.2 52.1,42.2 51.7,41.8 48.3,41.8 47.7,41.2
SW_7V on Top Layer "SW_7V_L01_P016" (solid, pour order 16): 47,50.8 47.1,50.7 47.2,50.7 55.1,50.7 55.4,50.4 55.4,47.6 55.3,47.5 52.2,47.5 52.1,47.6 52.1,49.566 51.866,49.8 50.2,49.8 50.1,49.7 50.1,47.6 49.5,47 46.5,47 44.2,44.7 43.7,44.2 42.5,44.2 42.4,44.3 42.4,44.5 42.5,44.6 43.2,44.6 44,45.4 44,50.5 44.2,50.7 46.3,50.7 46.6,51 46.8,51
SW_12V on Top Layer "SW_12V_L01_P015" (solid, pour order 15): 42.9,33.3 43,33.4 43,36.8 42.9,36.9 29.6,36.9 29.398,37.102 29.202,37.102 29,36.9 27.1,36.9 27,36.8 27,33.1 27.2,32.9 27.2,31.5 26.9,31.2 26.8,31.1 26.2,31.1 26.1,31 26.1,30.6 26.2,30.5 27.5,30.5 30.1,33.1 32,33.1 32.2,33.3
NetQ10_2 on Top Layer "NETQ10_2_L01_P013" (solid, pour order 13): 3.196,37.6 3.105,37.509 3.1,37.486 3.1,34.8 0.6,32.3 0.6,27.2 0.9,26.9 2.4,26.9 2.8,27.3 2.8,31.6 4.3,33.1 4.3,37.503 4.202,37.6
12/24V on Top Layer "12/24V_L01_P009" (solid, pour order 9): 32.4,11.6 31.3,12.7 25.8,12.7 25.3,12.2 25.3,10.3 25,10 22.2,10 21.8,10.4 21.9,10.5 21.9,15 23.624,16.724 26.612,16.724 27.2,17.3 27.4,17.5 32.3,17.5 32.7,17.1 32.7,14 33.4,13.3 35.3,13.3 35.6,13 35.6,10.1 35.5,10 33,10 32.4,10.6
12/24VC on Top Layer "12/24VC_L01_P007" (solid, pour order 7): 31.3,20.4 31.6,20.7 32.3,20.7 32.5,20.9 32.5,22.8 32.3,23 27.6,23 26.7,22.1 24.5,22.1 24,21.6 24,18.1 24.2,17.9 26.3,17.9 27.3,18.9 31.1,18.9 31.3,19.1
24V on Top Layer "24V_L01_P006" (solid, pour order 6): 18.7,23.2 18.7,22.6 19.2,22.1 22.6,22.1 22.9,21.8 22.9,18.3 22.6,18 15.4,18 14.1,19.3 14.1,23.7 14.2,23.8 18.1,23.8
24VPDB on Top Layer "24VPDB_L01_P005" (solid, pour order 5): 9.1,36.4 9.2,36.5 10.4,36.5 10.5,36.4 10.5,35.3 10.7,35.1 14.2,35.1 15.1,34.2 15.1,33 18.3,29.8 18.3,25.8 18.1,25.6 12.7,25.6 9.9,22.8 9.9,18.8 8.9,17.8 6.4,17.8 5.4,18.8 5.4,25 3.7,26.7 3.7,31.5 5.1,32.9 8.8,32.9 9.1,33.2
VBAT_Fused on Top Layer "VBAT_FUSED_L01_P004" (solid, pour order 4): 20.3,38 20.609,37.691 20.609,37.609 20.3,37.3 20.3,33.1 22.3,31.1 22.8,31.1 23,30.9 23,30.7 22.9,30.6 19.3,30.6 16.2,33.7 16.2,38.4 16.4,38.6 20.1,38.6 20.3,38.4
VBAT_LDOS on Top Layer "VBAT_LDOS_L01_P002" (solid, pour order 2): 28.7,47.3 28.4,47 28.4,43.4 28.6,43.2 35.3,43.2 36.2,44.1 39.2,44.1 39.3,44.2 39.3,44.5 39.1,44.7 36.2,44.7 33.6,47.3
VBAT on Top Layer "VBAT_L01_P001" (solid, pour order 1): 19.5,48.7 23,52.2 25,52.2 26.7,50.5 26.7,42.5 26.4,42.2 21.2,42.2 20.4,41.4 20.4,40.4 20.1,40.1 11.5,40.1 8.1,43.5 4,43.5 3.7,43.8 3.7,45.5 6.1,47.9 14.2,47.9 15,48.7
NetQ9_2 on Top Layer "NETQ9_2_L01_P000" (solid, pour order 0): 10.463,50.737 10.465,50.711 10.465,49.667 10.4,49.602 10.4,49.6 10.1,49.3 7,49.3 2.6,44.9 2.6,44.2 2.4,44 0.7,44 0.4,44.3 0.4,45.8 5.5,50.9 10.3,50.9
GND on Bottom Layer "GND_L04_P079" (solid, pour order 79): -7.592,-3.307 ccw(c-3.4,-3.307) -3.4,-7.5 91.601,-7.505 ccw(c91.601,-2.597) 96.509,-2.597 96.494,55.574 ccw(c92.965,55.574) 92.965,59.103 -2.995,58.992 ccw(c-2.995,54.405) -7.582,54.405
VBAT on Bottom Layer "NONET_L-01_P-001" (solid, pour order 69): 12.8,45.6 19.6,45.6 19.8,45.4 19.8,42.3 19.5,42 12.8,42 12.6,42.2 12.6,45.3
3V3 on Bottom Layer "Bottom Layer-3V3" (solid, pour order 65): 13.4,-1.2 27.3,-1.2 27.7,-0.8 30.3,-0.8 30.7,-1.2 46.8,-1.2 54,6 54,14.7 57.6,14.7 59.2,16.3 64.9,16.3 65.5,15.7 65.5,6.8 64.5,5.8 63.7,5.8 63.4,5.5 63.4,4.2 63.7,3.9 65.6,3.9 66.45,4.7 66.45,16.95 66.1,17.3 59.2,17.3 59,17.5 59,18.6 58.8,18.8 58.8,27.8 61.6,30.6 62.8,30.6 63.1,30.3 68.9,30.3 69.1,30.5 69.1,31.1 68.8,31.4 68.05,31.4 66.35,31.4 64.2,31.4 64.2,35.2 64,35.4 61.5,35.4 61.3,35.2 61.3,32.35 57.1,28.15 57.1,25.5 56,24.4 46.2,24.4 45.9,24.1 45.9,23.6 46.4,23.1 56.3,23.1 57.1,22.3 57.1,18.4 57.8,17.7 57.8,16.8 57.2,16.2 52.5,16.2 52.4,16.1 52.4,12.3 52.6,12.1 52.6,7 46.05,0.45 45.9,0.2 14.7,0.2 3.6,11.3 3.6,14.4 5.3,16.1 7.8,16.1 8.35,15.55 8.3,15.5 8.3,11.8 8.5,11.6 9.8,11.6 9.9,11.7 9.9,16.7 9.5,17.1 4.5,17.1 2,14.6 2,10.2
12V on Bottom Layer "Bottom Layer-12V" (solid, pour order 55): 32.1,24.8 32.3,25 41.4,25 41.6,24.8 41.6,16.3 41.3,16 40.7,15.4 40.7,15 41,14.7 41.7,14.7 42.4,15.4 42.4,24.8 42.6,25 44.5,25 44.7,25.2 44.7,27.4 44.2,27.9 32.4,27.9 31.9,27.4 31.9,26.65 31.9,26.6 20.6,15.3 11.2,15.3 11.1,15.2 11.1,14.4 11.2,14.3 21.6,14.3
3V3 on Bottom Layer "3V3_L04_P066" (solid, pour order 66): 62.6,41.6 62.9,41.3 63.6,41.3 63.9,41.6 63.9,49.9 69.2,55.2 75.1,55.2 75.6,55.7 75.6,57.7 75.2,58.1 74.7,58.1 74.4,57.8 74.4,56.3 74.2,56.1 68.6,56.1 62.6,50.1
24VPDB on Bottom Layer "24VPDB_L04_P042" (solid, pour order 42): 3.7,27 4.1,26.6 5.8,26.6 6.2,27 12.3,27 12.9,27.6 12.9,27.9 15.3,27.9 15.6,28.2 15.6,31.2 15.2,31.6 5.7,31.6 5.5,31.8 3.8,31.8 3.7,31.7
7V on Bottom Layer "7V_L04_P041" (solid, pour order 41): 60.8,39.9 61.1,40.2 61.1,42.7 60.1,43.7 57.9,43.7 57.7,43.5 57.7,42.3 57.3,41.9 43.9,41.9 43.7,41.7 43.7,40.2 44,39.9
VBAT_LDOS on Bottom Layer "VBAT_LDOS_L04_P040" (solid, pour order 40): 33.7,42.4 33.8,42.3 35.1,42.3 36.7,43.9 39.4,43.9 39.5,44 39.5,45.3 39.4,45.4 34.5,45.4 33.7,44.6
VBAT_Fused on Bottom Layer "VBAT_FUSED_L04_P039" (solid, pour order 39): 20.5,32 19.908,32.592 15.808,32.592 15.7,32.7 15.7,34 15.9,34.2 21,34.2 21.9,33.3 21.9,28.4 21.7,28.2 20.6,28.2 20.5,28.3
3V3 on Bottom Layer "3V3_L04_P038" (solid, pour order 38): 69,23.8 69,26.9 68.1,27.8 63.9,27.8 63.8,27.7 63.8,26.5 63.9,26.4 64.45,26.4 64.9,26.4 65.2,26.7 67,26.7 67.7,26 67.7,23.8 67.8,23.7 68.9,23.7
12V_HB_2 on Bottom Layer "12V_HB_2_L04_P025" (solid, pour order 25): 40.5,14.3 40.7,14.5 41.8,14.5 41.9,14.4 41.9,9.1 41.8,9 40.6,9 40.5,9.1
5V on Bottom Layer "5V_L04_P028" (solid, pour order 28): 57.7,37.4 58,37.1 61.3,37.1 61.6,37.4 63.9,37.4 67.3,40.8 67.3,42.2 66.3,43.2 66.3,47.5 66.6,47.8 70,47.8 70.1,47.7 70.1,42.2 70.5,41.8 81.8,41.8 85.6,45.6 85.6,50.9 86.3,51.6 88.1,51.6 88.2,51.5 88.2,49.9 88.1,49.8 86.3,49.8 86.2,49.7 86.2,44.4 83,41.2 83,21.3 82.9,21.2 74.8,13.1 73.5,13.1 73.2,13.4 73.2,14 73.5,14.3 74.2,14.3 81.35,21.45 81.4,39.3 79.9,40.8 69.1,40.8 64.2,35.9 56.8,35.9 56.4,35.5 56.4,30.7 56.2,30.5 55.4,30.5 55.2,30.7 55.2,36.9 55.7,37.4
12V_HB_1 on Bottom Layer "12V_HB_1_L04_P027" (solid, pour order 27): 11.1,14 11.2,14.1 12.1,14.1 12.5,13.7 12.5,8.7 12.4,8.6 11.2,8.6 11.1,8.7 11.1,8.9
GND on Layer 2 "GND_L03_P064" (solid, pour order 64): -7.592,-3.307 ccw(c-3.4,-3.307) -3.4,-7.5 91.601,-7.505 ccw(c91.601,-2.597) 96.509,-2.597 96.494,55.574 ccw(c92.965,55.574) 92.965,59.103 -2.995,58.992 ccw(c-2.995,54.405) -7.582,54.405
GND on Layer 1 "GND_L02_P062" (solid, pour order 62): -7.592,-3.307 ccw(c-3.4,-3.307) -3.4,-7.5 91.601,-7.505 ccw(c91.601,-2.597) 96.509,-2.597 96.494,55.574 ccw(c92.965,55.574) 92.965,59.103 -2.995,58.992 ccw(c-2.995,54.405) -7.582,54.405

## Silkscreen, mask and mechanical layers (free items; w line width, h text height)
Top Overlay:
  drawing of 144 lines, arcs and shapes, not listed
  text "5V" at 82.8,50.5 h1 r90
  text "QUADB" at 81.2,49.467 h1 r90
  text "FLASHING" at 68.8,48.3 h1
  text "VBAT" at 7.3,46.9 h1 r270
  text "GND" at 5.8,46.4 h1 r270
  text "QUAD ENC" at 79,45.2 h1 r90
  text "GND" at 82.8,45.1 h1 r90
  text "QUADA" at 81.2,44.067 h1 r90
  text "GND" at 82.8,38.7 h1 r90
  text "LIMB" at 81.2,38.351 h1 r90
  text "GND" at 82.8,34.1 h1 r90
  text "LIMA" at 81.3,33.651 h1 r90
  text "GND" at 5.9,32.4 h1 r270
  text "24V" at 7.4,32.4 h1 r270
  text "LIMIT SWITCH" at 79,32.2 h1 r90
  text "GND" at 5.9,28.8 h1 r270
  text "24V" at 7.4,28.8 h1 r270
  text "GND" at 85.8,28.1 h1 r90
  text "CAN2" at 83.6,23.7 h1 r90
  text "CANL" at 85.8,23.7 h1 r90
  text "CANH" at 85.8,19 h1 r90
  text "GND" at 85.6,14.1 h1 r90
  text "ABS ENC" at 58.2,10.1 h1
  text "ABS ENC" at 72.9,10 h1
  text "CAN1" at 83.6,9.9 h1 r90
  text "CANL" at 85.7,9.9 h1 r90
  text "SDA" at 74.6,8 h1
  text "3V3" at 78.9,8 h1
  text "SCK" at 56,7.9 h1
  text "CS" at 60.3,7.9 h1
  text "3V3" at 64.1,7.9 h1
  text "SCL" at 70.7,7.9 h1
  text "GND" at 74.6,6.3 h1
  text "GND" at 78.9,6.3 h1
  text "MOSI" at 55.5,6.2 h1
  text "MISO" at 59.6,6.2 h1
  text "GND" at 64.1,6.2 h1
  text "GND" at 70.7,6.2 h1
  text "Motor Output" at 23.7,6.133 h1
  text "CANH" at 85.8,5.5 h1 r90
  text "M+" at 25.9,3.8 h1
  text "M-" at 30.9,3.8 h1
  text "BMC" at 8.601,-3.9 h3
Bottom Overlay:
  drawing of 2663 lines, arcs and shapes, not listed
  text "AS" at 73.654,29.154 h1.27 r270

## Text inside footprints (layer, text, board x,y; h text height)
C77: Top Overlay "+" at 21.827,48.058 h1.02 r270; Mechanical 13 "+" at 23.4,48 h1.02 r270
C86: Top Overlay "+" at 10.3,18.3 h1.02; Mechanical 13 "+" at 10.3,18.3 h1.02